# EAGLE board irs-v5 (EAGLE 7.6.0)
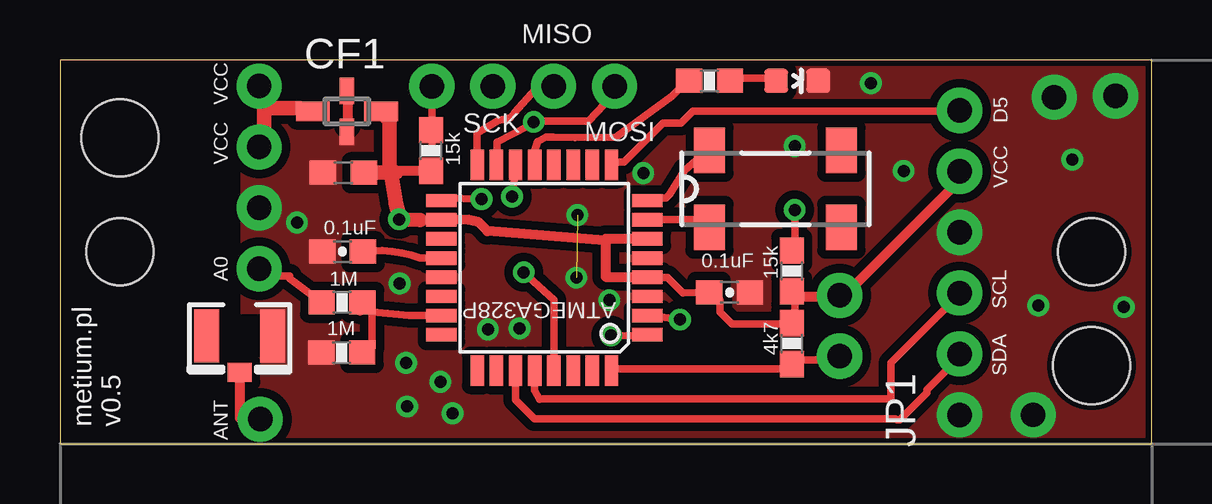
[diagram p0: board, top side]
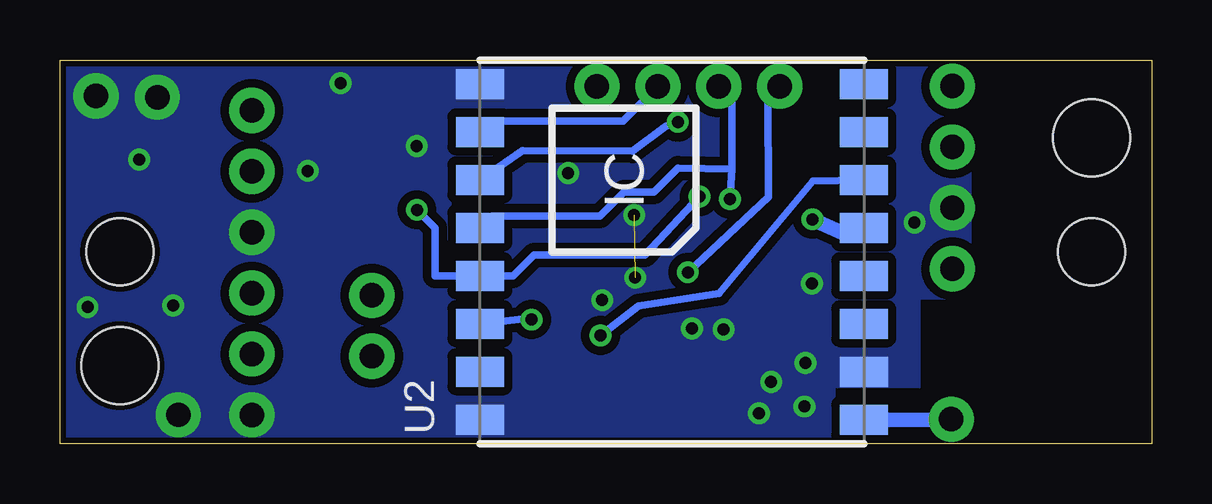
[diagram p1: board, bottom side, seen from below]

Size 45.5 x 16 mm. Coordinates in mm from the lower left corner, seen from the top.
Outline: 0,0 45.5,0 45.5,16 0,16 0,0
Copper layers (1*16): Top 0.035mm / dielectric 1.5mm / Bottom 0.035mm
Design rules "dirt_cheap_dirty_boards.v1 *": minimum track width 12mil, minimum drill 15mil, track to track 14mil, track to pad 14mil, pad to pad 12mil, via to via 12mil, smd to smd 0mil, copper to edge 10mil, drill to drill 12mil, minimum pad ring 12mil, minimum via ring 8mil, stop-mask expansion 2mil, vias tented up to drill 25mil, thermal gap 10mil
Holes 2.8 mm at 43,8 2.5,8
Holes 3.2 mm at 43,3.25 2.5,12.75
tRestrict: area 0,0 to 7.5,16
bRestrict: area 27,3.8 to 29,4.2; area 27,7.8 to 29.5,8.1; area 27,5.8 to 29,6.2; area 0,0 to 7.5,16; area 11,9.7 to 13.1,10.2; area 11,13.8 to 13.1,14.2; area 11,11.8 to 13.1,12.1; area 7.5,1.9 to 13.1,2.3; area 27,9.8 to 29.2,10.2; area 7.5,1.3 to 9.6,6

## Footprints (pad centres in the part's own frame; a part is rotated, then mirrored left to right if it is on the bottom)
1X04_NO_SILK_ALL_ROUND = drill 1.016 pad 1.88: 1 0,0; 2 2.54,0; 3 5.08,0; 4 7.62,0
C0603 = smd 1.1 x 1: 1 -0.85,0; 2 0.85,0
0603-CAP = smd 1.1 x 1: 1 -0.85,0; 2 0.85,0
NFM21C = smd 1.4 x 0.8: 1 -1.425,0; 3 1.425,0 | smd 0.6 x 1.1: 2@1 0,-0.85; 2@2 0,0.85
1X01_NO_SILK = drill 1.016 pad 1.88: 1 0,0
1X06_NO_SILK = drill 1.016 pad 1.88: 1 0,0; 2 2.54,0; 3 5.08,0; 4 7.62,0; 5 10.16,0; 6 12.7,0
1X02_NO_SILK = drill 1.016 pad 1.88: 1 0,0; 2 2.54,0
LED-0603 = smd 1 x 1: A 0,-0.877; C 0,0.877
MC-306 = smd 1.3 x 1.9: 1 -2.75,-1.6; 2 2.75,-1.6; 3 2.75,1.6; 4 -2.75,1.6
0603-RES = smd 1.1 x 1: 1 -0.85,0; 2 0.85,0
TQFP32-08 = smd 1.27 x 0.559: 1 -4.293,2.8; 2 -4.293,2; 3 -4.293,1.2; 4 -4.293,0.4; 5 -4.293,-0.4; 6 -4.293,-1.2; 7 -4.293,-2; 8 -4.293,-2.8; 17 4.293,-2.8; 18 4.293,-2; 19 4.293,-1.2; 20 4.293,-0.4; 21 4.293,0.4; 22 4.293,1.2; 23 4.293,2; 24 4.293,2.8 | smd 0.559 x 1.27: 9 -2.8,-4.293; 10 -2,-4.293; 11 -1.2,-4.293; 12 -0.4,-4.293; 13 0.4,-4.293; 14 1.2,-4.293; 15 2,-4.293; 16 2.8,-4.293; 25 2.8,4.293; 26 2,4.293; 27 1.2,4.293; 28 0.4,4.293; 29 -0.4,4.293; 30 -1.2,4.293; 31 -2,4.293; 32 -2.8,4.293
HOPE-RF-16 = smd 1.25 x 2: 3.3V 1,-8; ANT -7,-8; DIO0 3,-8; DIO1 5,-8; DIO2 7,-8; DIO3 -3,-8; DIO4 -1,-8; DIO5 -5,8; GND1 7,8; GND2 -7,8; GND3 -5,-8; MISO 5,8; MOSI 3,8; NSS -1,8; RESET -3,8; SCK 1,8
U.FL = smd 2.2 x 1.05: 1 0,1.375; 2 0,-1.375 | smd 0.8 x 1: 3 1.525,0

## Placement (x,y rotation side)
ASP1  [1X04_NO_SILK_ALL_ROUND]  15.5,14.9 0 top
C1  0.1uF  [C0603]  11.81,11.29 180 top
C2  0.1uF  [0603-CAP]  27.91,6.31 0 top
C3  0.1uF  [0603-CAP]  11.78,8 180 top
CF1  NFM21C  [NFM21C]  11.96,13.85 0 top
J1  [1X01_NO_SILK]  40.57,1.2 0 top
J2  [1X01_NO_SILK]  44,14.5 90 top
J3  [1X01_NO_SILK]  41.44,14.44 0 top
J5  ant  [1X01_NO_SILK]  8.35,1.02 0 top
JP1  [1X06_NO_SILK]  37.5,1.19 90 top
JP2  [1X02_NO_SILK]  32.5,3.64 90 top
JP3  [1X04_NO_SILK_ALL_ROUND]  8.3,7.29 90 top
LED1  green  [LED-0603]  30.73,15.13 270 top
Q1  32786  [MC-306]  29.83,10.62 0 top
R1  15k  [0603-RES]  15.46,12.22 90 top
R2  1k8  [0603-RES]  27.08,15.13 180 top
R3  4k7  [0603-RES]  30.5,4.17 270 top
R4  1M  [0603-RES]  11.76,5.89 0 top
R5  15k  [0603-RES]  30.5,7.2 90 top
R6  1M  [0603-RES]  11.74,3.8 180 top
U1  ATMEGA328P  [TQFP32-08]  20.19,7.34 180 top
U2  RFM69HCW-S2  [HOPE-RF-16]  20,8 90 bottom
X1  [U.FL]  7.49,4.49 270 top

## Library data of the parts
ASP1 JP3 = SparkFun-Connectors; PROD_ID: CONN-09696
C1 X1 = adafruit
C2 C3 = SparkFun-Capacitors; PROD_ID: CAP-00810
CF1 = murata-filter; MPN: NFM21CC102R1H3D; OC_FARNELL: 1828795; OC_NEWARK: 84R0165
J1-J3 J5 JP2 = SparkFun-Connectors
JP1 = SparkFun-Connectors; PROD_ID: CONN-08437
LED1 = SparkFun-LED
Q1 = crystal; MPN: MC-306 60.0KHZ 100PPM ,12.5PF; OC_FARNELL: 1278040; OC_NEWARK: 31M5576
R1-R6 = SparkFun-Passives
U1 = SparkFun-DigitalIC; PROD_ID: IC-09069
U2 = icmi-custom-parts

## Nets
ACT: R2.2 U1.13
ADC0: R4.2 R6.1 U1.23
GND: C1.2 C2.2 C3.2 CF1.2@1 J1.1 J2.1 J3.1 JP1.1 JP1.4 JP3.2 LED1.C R6.2 U1.3 U1.5 U1.21 U2.GND1 U2.GND2 U2.GND3 X1.1
MISO: ASP1.3 U1.16 U2.MISO
MOSI: ASP1.4 U1.15 U2.MOSI
N$1: LED1.A R2.1
N$2: JP3.1 R4.1
N$3: J5.1 U2.ANT X1.3
N$4: C3.1 U1.20
N$5: Q1.1 U1.7
N$6: Q1.4 U1.8
N$7: CF1.1 JP3.3 JP3.4
PD5: JP1.6 U1.9
RESET: ASP1.1 R1.2 U1.29
RFM_IRQ: U1.1 U2.DIO0
RFM_RST: U1.2 U2.RESET
SCK: ASP1.2 U1.17 U2.SCK
SDA: JP1.2 U1.27
SDL: JP1.3 U1.28
SEL: R5.2 U1.14 U2.NSS
VCC: C1.1 C2.1 CF1.3 JP1.5 JP2.2 R1.1 R3.1 R5.1 U1.4 U1.6 U1.18 U2.3.3V
WIRED: JP2.1 R3.2 U1.32

## Tracks (layer width: path | path; a pad name or v marks a point on that pad's centre or on a via)
ACT
  Top 0.305: R2.2 26,15 25.5,14.5 23.18,12.78 21.47,12.77 20.56,12.79 20.25,12.79 19.9,12.6 19.79,12.24 U1.13
ADC0
  Top 0.305: 15.75,5.35 U1.23 14.56,5.34 13,5.5 | 12.5,3.5 R6.1 13,4 13,5.5 | 12.5,5.5 R4.2 13,5.5
GND  (via drill 0.5 pad 0.25)  (1 unrouted)
  Top 0.305: U1.21 | 24.38,11.38 v24.32,11.28
  other vias: 19.16,4.8 14.42,3.37 14.16,6.68 15.86,2.58 14.47,1.54 44.35,5.69 40.78,5.77 35.17,11.37 33.81,15.03 42.2,11.84 21.52,6.92 30.63,12.41 22.9,5.98 9.88,9.22 17.84,4.76 16.36,1.26 21.57,9.53
  pour Bottom (rank 6, no thermals): 0,16 45.5,16 45.5,0 0,0
  pour Top (rank 6, no thermals): 0,16 45.5,16 45.5,0 0,0
MISO
  Top 0.305: U1.16 17.38,11.96 17.38,12.96 18.25,13.47 18.78,13.6 18.95,13.8 19.81,14.76 20.5,14.75 ASP1.3
  Bottom 0.305: U2.MISO 27.51,13.45 22.04,13.44 20.75,14.75 ASP1.3
MOSI  (via drill 0.5)
  Top 0.305: ASP1.4 23,14.5 22.02,13.45 19.77,13.45 v19.75,13.41 19.5,13.25 18.22,12.57 U1.15
  Bottom 0.305: U2.MOSI 26.22,12.22 21.64,12.19 20.25,13.25 v19.75,13.41
N$1
  Top 0.305: LED1.A 29.75,15.25 28,15.25 R2.1
N$2
  Top 0.305: R4.1 9.57,6.88 9.57,7 8.5,7 JP3.1
N$3
  Top 0.406: X1.3 7.49,2.69 7.49,1.06 8.35,1.09 J5.1
  Bottom 0.61: U2.ANT 8.35,1 J5.1
N$4
  Top 0.305: U1.20 15.02,7.74 arc27 C3.1
N$5
  Top 0.305: U1.7 26.84,9.34 Q1.1
N$6
  Top 0.305: U1.8 24.5,10.25 25.25,10.25 25.4,10.38 26.04,11.39 27,12.25 Q1.4
N$7
  Top 0.305: 10,14 CF1.1 | 8.5,12.5 JP3.3 | 8.5,14.5 8.5,14 JP3.4 8.5,14.5
  Top 0.61: 10,14 8.5,14 8.5,12.5
N$11
  Top 0.406: 11.98,14.43 11.98,13.27
PD5
  Top 0.305: 37.5,14 JP1.6 37.38,13.88 26.38,13.88 25.88,13.38 25.12,13.38 23.5,11.75 23,11.75 U1.9
RESET  (via drill 0.5)
  Top 0.305: v19.33,7.14 20.6,5.99 20.6,3.54 U1.29 | ASP1.1 15.5,12.5 R1.2
  Bottom 0.305: v19.33,7.14 15.97,10.29 16,14.5 15.5,14.5 ASP1.1
RFM_IRQ  (via drill 0.5)
  Top 0.305: v22.96,4.51 24,4.5 U1.1
  Bottom 0.305: v22.96,4.51 21.38,5.74 18.02,6.25 14.11,10.95 U2.DIO0
RFM_RST  (via drill 0.5)
  Top 0.305: v25.84,5.17 24.58,5.34 U1.2
  Bottom 0.305: v25.84,5.17 26.19,5.2 U2.RESET
SCK  (via drill 0.5)
  Top 0.305: v17.57,10.2 16,10.25 U1.17
  Bottom 0.305: 17.48,11.45 17.48,14.7 18,14.75 ASP1.2 | 17.48,11.45 v17.57,10.2 | U2.SCK 27.5,9.5 23,9.5 22,10.5 20.75,10.5 19.75,11.5 17.48,11.45
SDA
  Top 0.305: U1.27 18.99,1.82 19.79,1.02 34.83,1.02 34.88,1 35,1 36.12,2.12 36.12,2.25 37.5,3.62 JP1.2
SDL
  Top 0.305: U1.28 19.78,2.97 19.78,2.22 19.98,1.85 20.12,1.88 34.62,1.88 34.62,3.38 37.5,6.25 JP1.3
SEL  (via drill 0.5)
  Top 0.305: v18.84,10.3 19,11.5 U1.14 | v30.62,9.75 30.62,8.5 R5.2
  Bottom 0.305: v30.62,9.75 29.88,9 29.88,7 U2.NSS 26.62,7 25.75,7.88 21.12,7.88 v18.84,10.3
VCC  (via drill 0.5 pad 0.61)
  Top 0.305: 22.74,8.53 22.74,8.5 22.75,8.5 | 24.25,6.95 U1.4 25.33,6.93 25.97,6.29 27.05,6.29 C2.1 27.5,6 27.5,5.5 28,5 30.5,5 R3.1 | 16.02,9.33 U1.18 | 30.75,5.38 R3.1 | 30.62,5.38 R3.1 | R3.1 30.62,5.5 30.62,6.12 30.5,6.25 R5.1 30.75,6.12 | 32.5,6.12 JP2.2 32.5,6 | 37.5,11 JP1.5 | 14.12,9.5 v14.13,9.35 | 22.75,8.5 22.75,8.54 | 22.75,8.5 22.7,8.47 | 14,10 14,10.06 | 13,14 CF1.3 13.5,13.5 13.74,13.78
  Top 0.406: 24.25,6.95 22.75,6.95 22.74,7.63 22.74,8.5 | 16.02,9.33 17.05,9.34 17.43,9.25 17.81,8.86 22.7,8.47 | 15.02,9.33 U1.18 | U1.6 22.75,8.54 | 32.5,6.12 30.75,6.12 | 32.5,6 37.5,11 | 14,11.29 13.74,11.63 14,11.37 R1.1
  Top 0.61: 15.02,9.33 v14.13,9.35 | 14.12,9.5 14,10.06 | 13.74,13.78 13.74,11.63 14,10 | C1.1 14,11.29
  Bottom 0.305: 12.82,8.89 U2.3.3V | 12.82,8.76 U2.3.3V | 11.87,9.21 U2.3.3V
  Bottom 0.61: 12.82,8.76 v14.13,9.35
WIRED
  Top 0.305: 30.62,3.12 30.5,3.12 | 30.5,3.12 23,3.12 U1.32 | 30.62,3.5 R3.2 | R3.2 30.5,3.12 | JP2.1 32.5,3.5 30.75,3.5 R3.2

## Text on the board
tPlace: MISO | VCC | SCK | MOSI | D5 | VCC | VCC | A0 | SCL | SDA | metium.pl / v0.5 | ANT
Document: RESET | VCC